# Altium PCB [PCB]-WS2805-RGBCCT-LED-DRV_2025-10-18.pcbdoc (part 1 of 2)
Units mm, origin at the board's own origin, x right, y up, seen from the top; angles counter-clockwise.
Board outline 183.91 x 132.1 mm, 2 copper layers (Top Layer, Bottom Layer); 84 components, 65 nets, 282 pads, 200 vias.
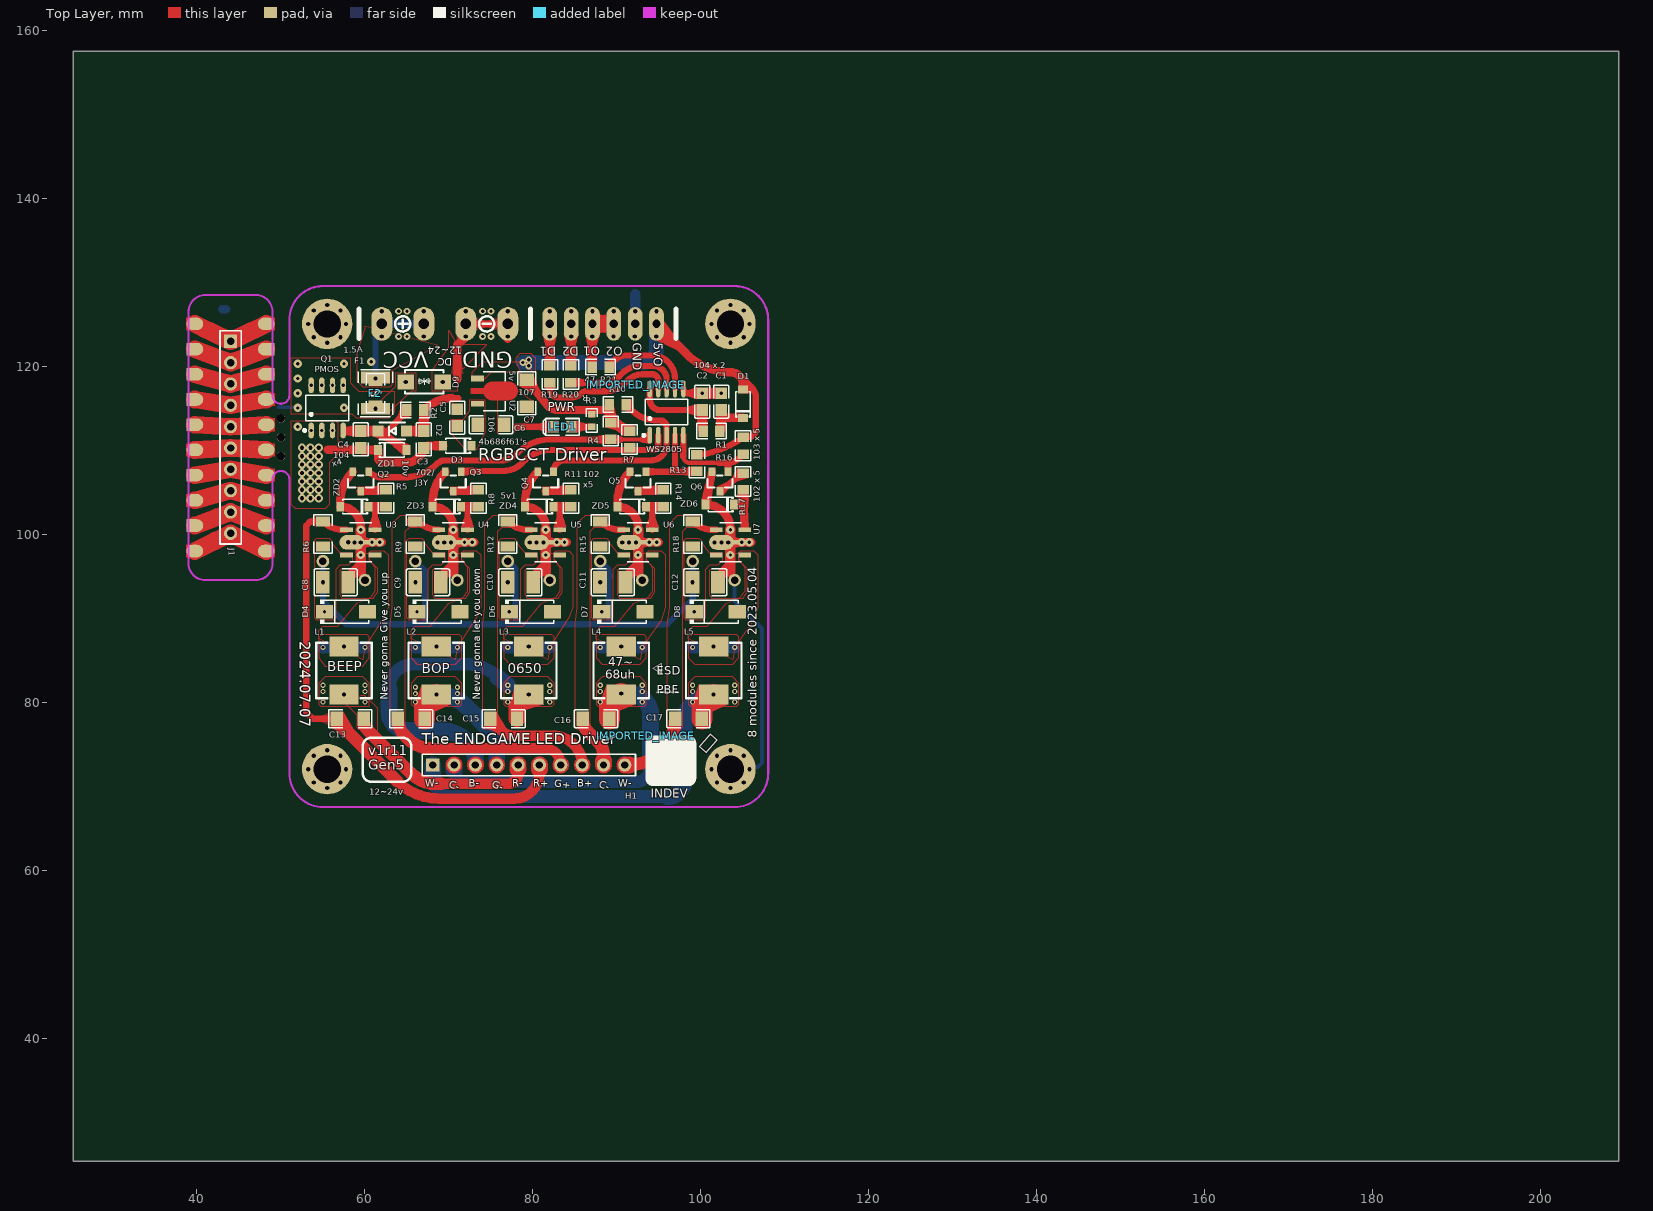
[diagram p0: Top Layer view]
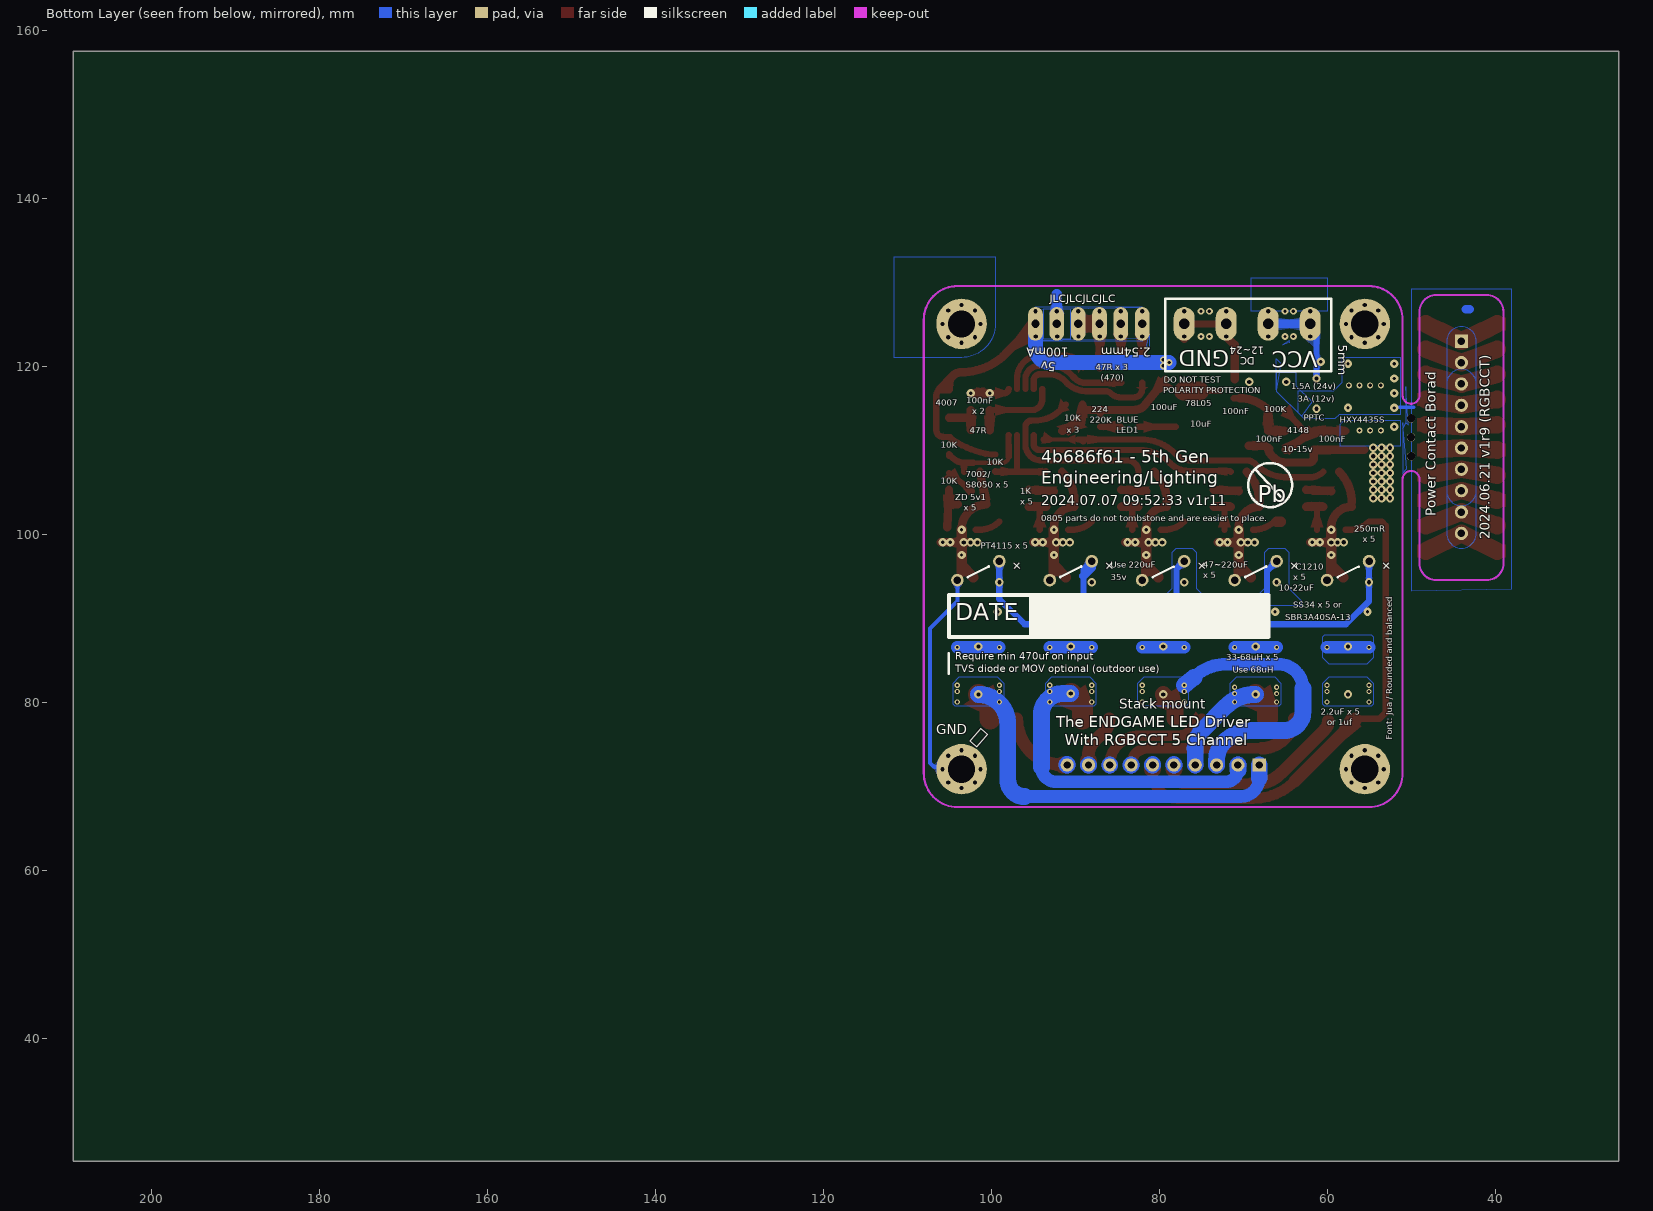
[diagram p1: Bottom Layer view, seen from below]

## Layer stack, top to bottom
Top Layer: signal copper (thickness not stored)
Dielectric: dielectric 0.32, FR-4, Dk 4.8
Bottom Layer: signal copper (thickness not stored)

## Board outline
209.307,25.4 25.4,25.4 25.4,157.498 209.307,157.498

## Components (designator, comment, footprint, x,y, rotation, side; value= is the part's Value field where it differs from the comment)
C1 "0.1uF" C0805 102.5,115.817 r90 top
C2 "0.1uF" C0805 100.25,115.817 r90 top
C3 "100nF" C0805 67.101,111.318 r90 top
C4 "100nF" C0805 59.601,111.318 r90 top
C5 "0.1uF" C0805 71.1,113.917 r90 top
C6 "10uF" C1206 75.1,113.067 r180 top
C7 "100uF" C1206 79.35,116.817 r90 top
C8 "10uF" C1210 56.6,94.317 r0 top
C9 "10uF" C1210 67.6,94.317 r0 top
C10 "10uF" C1210 78.6,94.317 r0 top
C11 "10uF" C1210 89.6,94.317 r0 top
C12 "10uF" C1210 100.6,94.317 r0 top
C13 "2.2uf" C1206 58.351,78.067 r180 top
C14 "2.2uf" C1206 65.6,78.067 r180 top
C15 "2.2uf" C1206 76.601,78.067 r0 top
C16 "2.2uf" C1206 87.599,78.067 r0 top
C17 "2.2uf" C1206 98.6,78.067 r0 top
D1 "1N4007W" SOD-123_L2.8-W1.8-LS3.7-RD 105.1,115.567 r90 top
D2 "1N4148W" SOD-123FL_L2.6-W1.6-LS3.4-RD 63.35,112.317 r180 top
D3 "1N4007W" SOD-123_L2.8-W1.8-LS3.7-RD 71.1,110.567 r180 top
D4 "SBR3A40SA-13" SMA_L4.4-W2.8-LS5.4-RD 57.85,90.817 r0 top
D5 "SBR3A40SA-13" SMA_L4.4-W2.8-LS5.4-RD 68.85,90.817 r0 top
D6 "SBR3A40SA-13" SMA_L4.4-W2.8-LS5.4-RD 79.85,90.817 r0 top
D7 "SBR3A40SA-13" SMA_L4.4-W2.8-LS5.4-RD 90.85,90.817 r0 top
D8 "SBR3A40SA-13" SMA_L4.4-W2.8-LS5.4-RD 101.85,90.817 r0 top
D9 "SMAJ30CA" SMA_L4.4-W2.8-LS5.1-BI 67.15,118.167 r180 top
F1 "3A PTC" R1206 61.35,116.817 r270 top
F2 "0ZCG0050FF2C" F1812 61.35,116.817 r90 top
H1 "HDR-F-2.54_1x10" HDR-F-2.54_1X10 79.6,72.567 r0 top
IMPORTED_IMAGE "IMPORTED_IMAGE" IMPORTED_IMAGE 92.35,117.817 r0 top
IMPORTED_IMAGE "IMPORTED_IMAGE" IMPORTED_IMAGE 93.503,76.071 r0 top
J1 "HDR-M-2.54_1x10" HDR-M-2.54_1X10 44.102,111.567 r270 top
L1 "47uh" IND-SMD_L7.2-W6.6_GPSR07X0 57.6,83.817 r270 top
L2 "47uh" IND-SMD_L7.2-W6.6_GPSR07X0 68.6,83.817 r270 top
L3 "47uh" IND-SMD_L7.2-W6.6_GPSR07X0 79.6,83.817 r270 top
L4 "47uh" IND-SMD_L7.2-W6.6_GPSR07X0 90.6,83.817 r270 top
L5 "47uh" IND-SMD_L7.2-W6.6_GPSR07X0 101.6,83.817 r270 top
LED1 "0805_B" LED0805_BLUE 83.6,112.817 r180 top
Q1 "HXY4435S" SOP-8_L4.9-W3.9-P1.27-LS6.0-BL 55.6,115.067 r0 top
Q2 "2N7002" SOT-23_L2.9-W1.3-P0.95-LS2.4-BR 59.6,106.317 r90 top
Q3 "2N7002" SOT-23_L2.9-W1.3-P0.95-LS2.4-BR 70.6,106.317 r90 top
Q4 "2N7002" SOT-23_L2.9-W1.3-P0.95-LS2.4-BR 81.6,106.317 r90 top
Q5 "2N7002" SOT-23_L2.9-W1.3-P0.95-LS2.4-BR 92.6,106.317 r90 top
Q6 "2N7002" SOT-23_L2.9-W1.3-P0.95-LS2.4-BR 102.35,106.317 r90 top
R1 "47Ω" R0805 101.351,112.316 r180 top
R2 "100KΩ" R0805 66.1,114.818 r180 top
R3 "220KΩ" R0603 87.1,113.567 r270 top
R4 "10KΩ" R0805 89.35,112.317 r90 top
R5 "1KΩ" R0805 62.6,104.317 r270 top
R6 "250MΩ" R1206 55.1,100.067 r270 top
R7 "10KΩ" R0805 91.6,111.317 r90 top
R8 "1KΩ" R0805 73.6,104.317 r270 top
R9 "250MΩ" R1206 66.1,100.067 r270 top
R10 "10KΩ" R0805 90.2,115.467 r180 top
R11 "1KΩ" R0805 84.6,104.317 r270 top
R12 "250MΩ" R1206 77.1,100.067 r270 top
R13 "10KΩ" R0805 99.6,108.517 r90 top
R14 "1KΩ" R0805 95.6,104.317 r270 top
R15 "250MΩ" R1206 88.1,100.067 r270 top
R16 "10KΩ" R0805 105.1,110.567 r90 top
R17 "1KΩ" R0805 105.1,106.317 r270 top
R18 "250MΩ" R1206 99.1,100.067 r270 top
R19 "47Ω" R0805 82.1,119.067 r90 top
R20 "47Ω" R0805 84.599,119.067 r90 top
R21 "47Ω" R0805 88.15,119.916 r180 top
U1 "WS2805" SOP-10_L4.9-W3.9-P1.00-LS6.0-BL 96,114.567 r0 top
U2 "7805(SOT-89)" SOT-89-3_L4.5-W2.5-P1.50-LS4.2-BR 74.85,117.067 r180 top
U3 "PT4115B89E" SOT-89-5_L4.5-W2.5-P1.50-LS4.5-BR 59.6,99.067 r0 top
U4 "PT4115B89E" SOT-89-5_L4.5-W2.5-P1.50-LS4.5-BR 70.6,99.065 r0 top
U5 "PT4115B89E" SOT-89-5_L4.5-W2.5-P1.50-LS4.5-BR 81.6,99.065 r0 top
U6 "PT4115B89E" SOT-89-5_L4.5-W2.5-P1.50-LS4.5-BR 92.6,99.065 r0 top
U7 "PT4115B89E" SOT-89-5_L4.5-W2.5-P1.50-LS4.5-BR 103.6,99.065 r0 top
ZD1 "16v" SOD-123_L2.8-W1.8-LS3.7-RD 63.35,110.068 r0 top
ZD2 "5v1" SOD-123_L2.8-W1.8-LS3.7-RD 58.85,103.317 r180 top
ZD3 "5v1" SOD-123_L2.8-W1.8-LS3.7-RD 69.85,103.317 r180 top
ZD4 "5v1" SOD-123_L2.8-W1.8-LS3.7-RD 80.85,103.317 r180 top
ZD5 "5v1" SOD-123_L2.8-W1.8-LS3.7-RD 91.85,103.316 r180 top
ZD6 "5v1" SOD-123_L2.8-W1.8-LS3.7-RD 102.35,103.567 r180 top
? "" ? 64.599,134.907 r0 top
? "" ? 109.598,98.567 r0 top
? "" ? 79.6,129.067 r0 top
? "" ? 61.885,66.52 r0 top
? "" ? 107.329,72.036 r0 top
? "" ? 97.315,65.89 r0 top

## Footprints (in the part's own frame and the unit in brackets; to place one, negate y for a bottom-side part, rotate by r counter-clockwise, add the part's x,y. Pads: shape width x height; smd on the part's side, far side on the other; paste and mask are expansions set on the pad)
C0805 [mm]
  rect 1.41x1.35 smd paste-100 mask+0.051: 1(-1,0) 2(1,0)
  silkscreen extent -1.96,-0.9 1.96,0.9
C1206 [mm]
  rect 1.485x1.728 smd paste-100 mask+0.051: 1(-1.593,0) 2(1.593,0)
  silkscreen extent -2.56,-1.09 2.56,1.09
C1210 [mm]
  rect 1.635x2.7 smd paste-100 mask+0.051: 1(-1.518,0) 2(1.517,0)
  silkscreen extent -2.56,-1.58 2.56,1.58
F1812 [mm]
  rect 1.407x3.499 smd paste-100 mask+0.051: 1(-1.853,0) 2(1.853,0)
  silkscreen extent -2.79,-2.03 2.79,2.03
HDR-F-2.54_1X10 [mil]
  rect 62x62 hole 35 paste+0 mask+2: 1(-450,0)
  round 62 hole 35 paste+0 mask+2: 2(-350,0) 3(-250,0) 4(-150,0) 5(-50,0) 6(50,0) 7(150,0) 8(250,0) 9(350,0) 10(450,0)
  silkscreen extent -500,-50 500,50
HDR-M-2.54_1X10 [mil]
  rect 62x62 hole 35 paste+0 mask+2: 1(-450,0)
  round 62 hole 35 paste+0 mask+2: 2(-350,0) 3(-250,0) 4(-150,0) 5(-50,0) 6(50,0) 7(150,0) 8(250,0) 9(350,0) 10(450,0)
  silkscreen extent -500,-50 500,50
IMPORTED_IMAGE [mm]
IND-SMD_L7.2-W6.6_GPSR07X0 [mm]
  rect 2.35x3.5 smd paste+0 mask+0.051: 1(-2.85,0) 2(2.85,0)
  silkscreen extent -3.3,-3.3 3.3,3.3
LED0805_BLUE [mm]
  rect 1.3x1.4 smd paste+0 mask+0.051: 1(-1.05,0) 2(1.05,0)
  silkscreen extent -2,-1 2.3,1
R0603 [mm]
  rect 0.806x0.864 smd paste-100 mask+0.051: 1(-0.753,0) 2(0.753,0)
  silkscreen extent -1.39,-0.66 1.39,0.66
R0805 [mm]
  rect 1.133x1.377 smd paste-100 mask+0.051: 1(-1,0) 2(1,0)
  silkscreen extent -1.76,-0.92 1.76,0.92
R1206 [mm]
  rect 1.208x1.701 smd paste-100 mask+0.051: 1(-1.479,0) 2(1.479,0)
  silkscreen extent -2.31,-1.08 2.31,1.08
SMA_L4.4-W2.8-LS5.1-BI [mm]
  rect 2x1.8 smd paste+0 mask+0.051: 1(-2.2,0) 2(2.2,0)
  silkscreen extent -2.3,-1.4 2.3,1.4
SMA_L4.4-W2.8-LS5.4-RD [mm]
  rect 2.046x1.62 smd paste+0 mask+0.051: 1(-2.566,0) 2(2.565,0)
  silkscreen extent -3.08,-1.44 2.7,1.44
SOD-123_L2.8-W1.8-LS3.7-RD [mm]
  rect 0.95x1.15 smd paste+0 mask+0.051: 1(-1.693,0) 2(1.693,0)
  silkscreen extent -1.58,-0.87 1.41,0.87
SOD-123FL_L2.6-W1.6-LS3.4-RD [mm]
  rect 1.3x1.3 smd paste+0 mask+0.051: 1(1.7,0) 2(-1.7,0)
  silkscreen extent -1.5,-1 1.5,1
SOP-8_L4.9-W3.9-P1.27-LS6.0-BL [mm]
  oval 0.63x1.865 smd paste+0 mask+0.051: 1(-1.905,-2.682) 2(-0.635,-2.682) 3(0.635,-2.682) 4(1.905,-2.682) 5(1.905,2.682) 6(0.635,2.682) 7(-0.635,2.682) 8(-1.905,2.682)
  silkscreen extent -2.82,-2.83 2.58,1.52
SOP-10_L4.9-W3.9-P1.00-LS6.0-BL [mm]
  oval 0.525x2.014 smd paste+0 mask+0.051: 1(-2,-2.757) 2(-1,-2.757) 3(0,-2.757) 4(1,-2.757) 5(2,-2.757) 6(2,2.757) 7(1,2.757) 8(0,2.757) 9(-1,2.757) 10(-2,2.757)
  silkscreen extent -2.86,-2.91 2.53,1.52
SOT-23_L2.9-W1.3-P0.95-LS2.4-BR [mm]
  rect 1x0.8 smd paste+0 mask+0.051: 1(1.15,-0.95) 2(1.15,0.95) 3(-1.15,0)
  silkscreen extent -0.7,-1.5 0.7,1.5
SOT-89-3_L4.5-W2.5-P1.50-LS4.2-BR [mm]
  rect 1.575x0.672 smd paste+0 mask+0.051: 1(1.356,-1.5) 3(1.356,1.5)
  Top Layer region: -2.283,0.95 -0.429,0.95 -0.384,0.949 -0.34,0.946 -0.296,0.94 -0.252,0.933 -0.208,0.924 -0.165,0.912 -0.123,0.899 -0.081,0.884 -0.04,0.866 0,0.847 0.04,0.826 0.078,0.803 0.115,0.779 0.151,0.752 0.185,0.724 0.219,0.695 0.251,0.664 0.281,0.631 0.31,0.597 0.337,0.562 0.362,0.525 0.386,0.488 0.408,0.449 0.428,0.409 0.447,0.33 2.144,0.33 2.144,-0.33 0.447,-0.33 0.428,-0.409 0.408,-0.449 0.386,-0.488 0.362,-0.526 0.337,-0.562 0.31,-0.597 0.281,-0.631 0.251,-0.664 0.219,-0.695 0.185,-0.725 0.151,-0.753 0.115,-0.779 0.078,-0.804 0.04,-0.827 0,-0.848 -0.04,-0.867 -0.081,-0.884 -0.123,-0.899 -0.165,-0.913 -0.208,-0.924 -0.252,-0.934 -0.296,-0.941 -0.34,-0.946 -0.384,-0.949 -0.429,-0.95 -2.283,-0.95 -2.328,-0.949 -2.372,-0.946 -2.416,-0.941 -2.46,-0.934 -2.504,-0.924 -2.547,-0.913 -2.589,-0.899 -2.631,-0.884 -2.672,-0.867 -2.713,-0.848 -2.752,-0.827 -2.79,-0.804 -2.827,-0.779 -2.863,-0.753 -2.898,-0.725 -2.931,-0.695 -2.963,-0.664 -2.993,-0.631 -3.022,-0.597 -3.049,-0.562 -3.075,-0.526 -3.098,-0.488 -3.12,-0.449 -3.141,-0.409 -3.159,-0.369 -3.175,-0.327 -3.189,-0.285 -3.202,-0.242 -3.212,-0.199 -3.22,-0.155 -3.227,-0.111 -3.231,-0.067 -3.233,-0.022 -3.233,0.022 -3.231,0.067 -3.227,0.111 -3.22,0.155 -3.212,0.199 -3.202,0.242 -3.189,0.285 -3.175,0.327 -3.159,0.369 -3.141,0.409 -3.12,0.449 -3.098,0.488 -3.075,0.525 -3.049,0.562 -3.022,0.597 -2.993,0.631 -2.963,0.664 -2.931,0.695 -2.898,0.724 -2.863,0.752 -2.827,0.779 -2.79,0.803 -2.752,0.826 -2.713,0.847 -2.672,0.866 -2.631,0.884 -2.589,0.899 -2.547,0.912 -2.504,0.924 -2.46,0.933 -2.416,0.94 -2.372,0.946 -2.328,0.949
  silkscreen extent -1.95,-2.33 0.7,2.33
SOT-89-5_L4.5-W2.5-P1.50-LS4.5-BR [mm]
  rect 1.5x0.574 smd paste-100 mask+0.051: 1(1.698,-1.5) 3(1.698,1.5) 4(-1.698,1.5) 5(-1.698,-1.5)
  oval 2.94x1.76 smd paste-100 mask+0.051: 2(-1.068,0)
  rect 2.209x0.552 smd paste-100 mask+0.051: 2(1.343,0)
  silkscreen extent -1.3,-2.33 1.3,2.33
? [mm]

## Free pads (board coordinates)
  oval 1.75x4 smd far side paste-100 mask+0.051: 1(82.1,125.068) 1(84.64,125.066) 1(87.18,125.068) 1(89.72,125.066) 1(92.26,125.068) 1(94.8,125.066)
  oval 1.75x4 smd paste-100 mask+0.051: 1(82.1,125.068) 1(84.64,125.066) 1(87.18,125.068) 1(89.72,125.066) 1(92.26,125.068) 1(94.8,125.066)
  round 1.75 hole 1.25 paste+0 mask+0.051: 3(62.1,125.067) 4(67.1,125.067) 5(72.1,125.067) 6(77.1,125.067)
  round 1.5 hole 0.9 paste+0 mask+0.051: 4(55.099,96.82) 4(60.1,94.568) 4(66.099,96.819) 4(71.1,94.568) 4(77.099,96.819) 4(82.1,94.568) 4(88.099,96.819) 4(93.1,94.568) 4(99.099,96.819) 4(104.1,94.568)
  rect 1x1.5 smd paste+0 mask+0.051: 5(39.351,119.069) 5(39.351,122.069) 5(39.351,116.069) 5(39.351,113.069) 5(39.351,107.068) 5(39.351,101.068) 5(48.853,119.069) 5(48.853,122.069)
  oval 2x1.5 smd paste+0 mask+0.051: 5(39.849,125.073) 5(39.849,98.032) 5(39.851,119.072) 5(39.851,122.072) 5(39.851,116.072) 5(39.851,113.072) 5(39.851,110.072) 5(39.851,107.071) 5(39.851,104.071) 5(39.851,101.071) 5(48.353,101.071) 5(48.353,104.071) 5(48.353,107.071) 5(48.353,110.072) 5(48.353,113.072) 5(48.353,116.072) 5(48.353,119.072) 5(48.353,122.072) 5(48.355,98.032) 5(48.355,125.073)
  round 6 hole 3.25 paste+0 mask+0.051: 6(55.6,72.067) 6(55.6,125.067) 6(103.6,72.067) 6(103.6,125.067)
  round 1.25 hole 1 paste+0 mask+0.051: 6(82.1,125.067) 6(84.64,125.067) 6(87.18,125.067) 6(89.72,125.068) 6(92.26,125.067) 6(94.8,125.067)
  round 1 hole 1 unplated paste+0: ""(50.098,109.318) ""(50.098,113.817) ""(50.1,111.567)
  oval 2.5x4 smd far side paste-100 mask+0.051: ""(62.1,125.068) ""(67.1,125.068) ""(72.1,125.068) ""(77.1,125.068)
  oval 2.5x4 smd paste-100 mask+0.051: ""(62.1,125.068) ""(67.1,125.068) ""(72.1,125.068) ""(77.1,125.068)

## Via types
v1: diameter 1, hole 0.5, Top Layer to Bottom Layer, tented both sides, 107 vias
v2: diameter 0.62, hole 0.31, Top Layer to Bottom Layer, tented both sides, 40 vias
v3: diameter 1, hole 0.4, Top Layer to Bottom Layer, tented both sides, 35 vias
v4: diameter 0.8, hole 0.4, Top Layer to Bottom Layer, tented both sides, 11 vias
v5: diameter 0.7, hole 0.4, Top Layer to Bottom Layer, tented both sides, 7 vias

## Nets (pads, with @x,y where several pads share a name; then routed paths per layer and width w, separated by ;. In a path a pad name is that pad's centre, name@x,y a point inside that pad or via, vN(x,y) a via of type N, cw(c..) or ccw(c..) an arc to the next point about the centre after c; other vN are vias at no path point)
+5V: C7.2 D1.2 pad.1@94.8,125.066 pad.6@94.8,125.067 R3.1 R4.2 R7.2 R10.2 R13.2 R16.2 U2.1 | length 71.1
  Top Layer w0.5: 96.287,123.567 ccw(c96.287,123.58) 96.296,123.571
  Top Layer w0.75: 87.054,114.818 cw(c86.945,114.708) 87.1,114.708 R3.1@87.1,114.32 ; R13.2@99.6,109.517 100.151,109.517 ccw(c98.207,121.208) R16.2@105.1,111.567 ; R16.2@104.953,111.567 R16.2@105.1,111.567 ; R16.2@105.087,111.554 R16.2@105.1,111.567 ; R16.2@105.15,111.617 ccw(c105.15,111.567) R16.2@105.1,111.567 ; R16.2@105.15,111.618 105.801,111.618 ; 105.8,111.617 ccw(c105.8,112.417) 106.6,112.417 106.6,116.567 ccw(c105.903,116.567) 106.396,117.06 106.196,117.259
  Top Layer w1: C7.2@79.35,118.409 81.851,115.316 ; 81.85,115.317 ccw(c83.057,116.524) 83.057,114.817 ; 83.057,114.818 R10.2@88.739,114.818 ; R10.2@89.199,115.468 R4.2@89.35,113.317 R7.2@91.6,112.317 ; v1(94.76,123.567) 96.286,123.566 ; pad.1@94.8,125.066 98.394,121.473 ; 98.393,121.474 ccw(c103.6,126.681) 103.6,119.317 ; 105.1,117.817 ccw(c103.6,117.817) 104.66,118.878 ; 105.1,117.818 D1.2@105.1,117.259 106.197,117.259 ; 106.196,117.259 104.66,118.878 ; 103.6,119.317 cw(c103.6,117.817) 104.66,118.878 ; 103.6,119.317 cw(c103.6,117.817) 104.66,118.878
  Bottom Layer w1.75: v4(78.9,120.467) 93.1,120.467 ccw(c93.1,122.167) 94.8,122.167 pad.1@94.8,125.066 94.8,122.768
  other v1: 94.8,126.567
  other v4: 79.6,120.067 79.6,120.817
B_GND: C15.2 H1.3 L3.2 | length 36.9
  Top Layer w2: C15.2@78.193,78.067 78.193,79.56 v1(79.6,80.967)
  Bottom Layer w1.5: 62.968,81.667 cw(c65.868,81.667) 65.868,84.567 72.1,84.567 cw(c72.1,79.135) 75.941,82.976
  Bottom Layer w2: 62.968,81.667 62.968,78.917 ccw(c65.217,78.917) 65.217,76.668 69.088,76.668 cw(c69.088,72.055) 72.35,75.317 ; 72.35,75.317 cw(c70.177,73.144) H1.3@73.25,73.144 ; H1.3@73.25,73.144 H1.3@73.25,72.567 ccw(c73.178,72.639) H1.3@73.28,72.639 ; 75.94,82.976 v2(77.1,82.067)
  other v2: 77.1,80.067 82.1,80.067 77.1,81.318 82.1,81.317 82.1,82.068
B_PWM: Q4.1 R10.1 U1.3 | length 23.3
  Top Layer w0.75: Q4.1@82.55,107.467 82.55,107.517 cw(c83.85,107.517) 83.85,108.817 94.1,108.817 ccw(c94.1,110.717) 96,110.717 ; R10.1@91.201,115.468 91.864,114.805 ; 91.863,114.804 ccw(c94.85,117.792) 94.85,113.567 95.25,113.567 cw(c95.25,112.817) 96,112.817 U1.3@96,111.81 95.999,110.718
B_VCC: C15.1 H1.8 R12.1 U5.4 | length 16.8
  Top Layer w0.75: R12.1@77.1,101.546 ccw(c79.466,103.912) 79.466,100.566 U5.4@79.902,100.566
  Top Layer w1.25: C15.1@75.008,78.067 76.588,76.487 ; 76.588,76.486 ccw(c77.6,77.498) 77.6,76.067 82.1,76.067 82.45,76.067 cw(c82.45,72.567) H1.8@85.95,72.567
C0: J1.1 pad.5@39.849,125.073 pad.5@48.355,125.073 | length 9.5
  Top Layer w2.1: pad.5@39.85,125.067 J1.1@44.102,122.997 pad.5@48.353,125.067
C1: J1.2 pad.5@39.351,122.069 pad.5@39.851,122.072 pad.5@48.353,122.072 pad.5@48.853,122.069 | length 9.1
  Top Layer w2.1: pad.5@39.852,122.067 J1.2@44.102,120.457 pad.5@48.351,122.067
C2: J1.3 pad.5@39.351,119.069 pad.5@39.851,119.072 pad.5@48.353,119.072 pad.5@48.853,119.069 | length 8.8
  Top Layer w2.1: pad.5@39.852,119.067 J1.3@44.102,117.917 pad.5@48.351,119.067
C3: J1.4 pad.5@39.351,116.069 pad.5@39.851,116.072 pad.5@48.353,116.072 | length 8.6
  Top Layer w2.1: pad.5@39.852,116.068 J1.4@44.102,115.377 pad.5@48.351,116.068
C4: J1.5 pad.5@39.351,113.069 pad.5@39.851,113.072 pad.5@48.353,113.072 | length 8.5
  Top Layer w2.1: pad.5@39.852,113.065 J1.5@44.102,112.837 pad.5@48.351,113.065
C5: J1.6 pad.5@39.851,110.072 pad.5@48.353,110.072 | length 8.5
  Top Layer w2.1: pad.5@39.852,110.066 J1.6@44.102,110.297 pad.5@48.351,110.066
C5_1: C5.1 C6.2 D3.1 U2.3
C6: J1.7 pad.5@39.351,107.068 pad.5@39.851,107.071 pad.5@48.353,107.071 | length 8.6
  Top Layer w2.1: pad.5@39.852,107.066 J1.7@44.102,107.757 pad.5@48.351,107.063
C7: J1.8 pad.5@39.851,104.071 pad.5@48.353,104.071 | length 8.8
  Top Layer w2.1: pad.5@39.852,104.066 J1.8@44.102,105.217 pad.5@48.351,104.064
C8: J1.9 pad.5@39.351,101.068 pad.5@39.851,101.071 pad.5@48.353,101.071 | length 9.1
  Top Layer w2.1: pad.5@39.852,101.066 J1.9@44.102,102.677 pad.5@48.351,101.064
C9: J1.10 pad.5@39.849,98.032 pad.5@48.355,98.032 | length 9.5
  Top Layer w2.1: pad.5@39.85,98.026 J1.10@44.102,100.137 pad.5@48.353,98.026
D2_1: C4.2 D2.1 Q1.4 R2.2 ZD1.2 | length 11.8
  Top Layer w0.75: 62.374,111.836 R2.2@65.1,114.818 ; R2.2@65.096,114.558 ccw(c65.087,114.567) R2.2@65.1,114.567
  Top Layer w1: 57.95,112.316 D2.1@61.65,112.317 ZD1.2@65.043,110.068
D5_2: D5.2 L2.1 U4.1 | length 5
  Bottom Layer w1.5: v2(66.1,86.567) v2(71.1,86.567)
  other v1: 68.6,86.667
D6_2: D6.2 L3.1 U5.1 | length 5
  Bottom Layer w1.5: v2(77.1,86.567) v2(82.1,86.567)
  other v1: 79.6,86.667
DI1: pad.1@82.1,125.068 pad.6@82.1,125.067 R19.2 | length 3.5
  Top Layer w1: R19.2@82.1,120.067 v1(82.1,123.566)
  other v1: 82.1,126.567
DI2: pad.1@84.64,125.066 pad.6@84.64,125.067 R20.2 | length 3.5
  Top Layer w1: R20.2@84.6,120.067 ccw(c84.6,120.107) R20.2@84.64,120.107 ; R20.2@84.64,120.106 v1(84.64,123.567)
  other v1: 84.64,126.567
DO1: pad.1@87.18,125.068 pad.1@89.72,125.066 pad.6@87.18,125.067 pad.6@89.72,125.068 R21.2 | length 6.3
  Top Layer w1: R21.2@87.1,120.067 ccw(c87.1,120.107) R21.2@87.14,120.107 ; v1(87.14,123.567) R21.2@87.149,119.918
  Top Layer w1.25: pad.6@87.18,125.067 pad.1@89.72,125.066
  other v1: 89.68,123.567 87.18,126.567 89.72,126.567
FTVS: D9.2 F1.2 F2.1 Q1.5 Q1.6 Q1.7 Q1.8 | length 2.2
  Bottom Layer w0.4: 49.75,115.167 51.5,115.167
  Bottom Layer w1: 43.1,126.817 43.6,126.817
  other v1: 61.35,114.964 64.95,118.167
  other v3: 52.1,115.067 57.6,115.067 52.1,116.817 52.1,118.567 52.1,120.316 57.6,120.317
  other v5: 53.695,117.749 54.965,117.749 56.235,117.749 57.505,117.749
G_GND: C14.1 H1.4 L2.2 | length 15.8
  Top Layer w2.5: C14.1@67.193,78.067 67.193,79.56 v1(68.6,80.967)
  Bottom Layer w2: v1(68.6,80.967) 68.721,80.967 cw(c68.721,76.188) 72.1,79.567 74.859,76.807 cw(c72.589,74.537) 75.8,74.537 ccw(c75.824,74.513) 75.79,74.513 H1.4@75.79,72.567
  other v2: 66.1,80.067 71.1,80.067 66.1,81.067 71.1,81.067 66.1,81.817 71.1,81.817
G_PWM: Q3.1 R7.1 U1.2 | length 25.6
  Top Layer w0.75: Q3.1@71.55,107.467 cw(c71.792,107.225) Q3.1@71.792,107.567 ; Q3.1@71.793,107.566 76.1,107.566 cw(c76.102,107.564) 76.102,107.567 76.6,107.567 ccw(c76.6,110.585) 78.734,108.451 78.936,108.653 cw(c82.35,105.239) 82.35,110.067 94.349,110.067 ccw(c94.349,110.718) 95.001,110.718 U1.2@95,111.81
G_VCC: C14.2 H1.7 R9.1 U4.4 | length 26.1
  Top Layer w0.75: R9.1@66.1,101.546 66.1,101.558 66.219,101.677 ccw(c68.903,104.36) U4.4@68.903,100.566
  Top Layer w1.25: R9.1@65.6,101.546 R9.1@66.1,101.546 ; 67.85,74.567 81.41,74.567 cw(c81.41,72.567) H1.7@83.41,72.567
  Top Layer w1.5: C14.2@64.008,78.067 ccw(c66.802,78.067) 64.826,76.091 65.1,75.817 65.289,75.628 ccw(c67.85,78.188) 67.85,74.567
  Bottom Layer w2: H1.7@83.41,72.567 cw(c83.444,72.567) H1.7@83.42,72.591
GND: C1.2 C2.2 C3.2 C5.2 C6.1 C7.1 C8.2 C9.2 C10.2 C11.2 C12.2 D2.2 D9.1 LED1.2 pad.1@92.26,125.068 pad.4@60.1,94.568 pad.4@71.1,94.568 pad.4@82.1,94.568 pad.4@93.1,94.568 pad.4@104.1,94.568 pad.5@72.1,125.067 pad.6@77.1,125.067 pad.6@92.26,125.067 pad.6@103.6,72.067 pad.@72.1,125.068 pad.@77.1,125.068 Q2.2 Q3.2 Q4.2 Q5.2 Q6.2 R2.1 U1.6 U3.2 U4.2 U5.2 U6.2 U7.2 ZD2.2 ZD3.2 ZD4.2 ZD5.2 ZD6.2 | length 158.4
  Top Layer w0.75: ZD2.2@57.157,103.317 ZD2.2@57.158,103.864 ; v3(59.599,100.567) v3@59.599,100.876 ; ZD3.2@68.157,103.317 ZD3.2@68.158,103.864 ; 70.479,116.217 71.201,116.217 ; v3(70.599,100.565) ccw(c70.597,100.568) v3@70.6,100.568 ; 78.1,112.817 80.486,112.817 ; ZD4.2@79.157,103.317 ZD4.2@79.157,103.863 ; 80.487,112.816 LED1.2@82.55,112.817 ; U1.6@98,117.324 ccw(c98.506,117.323) 98.506,116.817 C2.2@100.251,116.817
  Top Layer w0.8: pad.@72.1,125.068 pad.@77.101,125.067 ; pad.@77.1,124.07 pad.@77.1,125.068
  Top Layer w1: ZD2.2@57.157,103.317 cw(c57.158,100.876) v3@59.599,100.876 ; ZD2.2@57.158,103.864 cw(c62.253,103.864) Q2.2@58.65,107.467 ; v1(59.6,99.067) 60.944,99.067 v3@62.1,99.067 ; D2.2@65.05,112.317 67.101,112.316 R2.1@67.101,114.818 ; R2.1@67.1,114.817 cw(c70.48,111.437) 70.48,116.217 ; ZD3.2@68.157,103.317 cw(c68.158,100.876) v3@70.599,100.876 ; ZD3.2@68.158,103.864 cw(c73.253,103.864) Q3.2@69.65,107.467 ; v1(69.532,99.065) v3(71.942,99.065) v3@73.101,99.065 ; 71.099,118.468 71.099,121.854 71.099,122.567 v1(72.1,123.567) ; pad.@77.1,123.267 pad.@77.1,125.068 ; ZD4.2@79.157,103.317 cw(c79.157,100.875) v3@81.598,100.875 ; ZD4.2@79.157,103.863 cw(c84.254,103.863) Q4.2@80.65,107.467 ; v1(80.532,99.066) U5.2@82.943,99.066 v3@84.099,99.065 ; ZD5.2@90.157,103.317 cw(c90.157,100.875) v3@92.598,100.875 ; ZD5.2@90.157,103.863 cw(c95.253,103.863) Q5.2@91.65,107.467 ; U6.2@91.533,99.065 93.944,99.065 v3@95.1,99.065 ; C2.2@100.251,116.817 v3(102.5,116.817) ; ZD6.2@100.657,103.567 cw(c100.658,100.626) 103.599,100.626 v3(103.599,100.566) ; ZD6.2@100.657,103.568 Q6.2@101.4,107.467 ; v1(102.533,99.066) v3(104.942,99.066) v3@106.1,99.065
  Top Layer w1.25: C8.2@58.186,94.904 59.601,96.319 ; 59.6,95.567 v3@59.6,100.567 ; C9.2@69.187,94.902 70.601,96.317 ; 70.6,95.565 v3(70.599,100.565) ; C10.2@80.185,94.902 81.6,96.317 ; 81.6,95.565 81.6,97.565 v3(81.599,100.565) ; C11.2@91.185,94.902 92.6,96.317 ; 92.6,95.565 v3(92.6,97.565) v3@92.6,100.566 ; C12.2@102.186,94.902 103.601,96.317 ; v3(103.599,100.566) v3@103.599,100.626 ; 103.6,95.565 v3(103.599,100.566)
  Top Layer w2.25: 75.26,117.077 77.16,117.077
  Bottom Layer w0.5: pad.6@103.601,72.067 103.85,72.316 106.85,72.316 107.35,72.816 107.35,88.816 104.099,92.067 pad.4@104.099,94.566
  Bottom Layer w1.25: pad.1@92.25,126.577 ccw(c92.26,126.577) v1(92.26,126.567) ; pad.1@92.285,124.574 92.285,127.556 92.285,128.575
  other v1: 103.6,69.817 102.009,70.476 105.191,70.476 101.35,72.067 105.85,72.067 102.009,73.658 105.191,73.658 103.6,74.317 58.1,99.068 58.85,99.067 68.716,99.065 70.349,99.065 79.716,99.066 81.349,99.065 90.716,99.066 91.532,99.066 92.349,99.066 101.716,99.066 103.35,99.066 69.35,118.167 77.1,123.567 92.22,123.566 72.1,126.567 77.1,126.567
  other v3: 59.6,97.567 70.6,97.565 81.6,97.565 103.6,97.566 60.942,99.067 61.849,99.067 72.849,99.066 82.942,99.065 83.849,99.066 93.942,99.066 94.849,99.066 105.849,99.066 92.599,100.566 100.25,116.817
  other v4: 74.1,123.567 75.1,123.567 74.1,126.567 75.1,126.567
HOLE1: pad.6@103.6,125.067
  other v1: 103.6,122.817 102.009,123.476 105.191,123.476 101.35,125.067 105.85,125.067 102.009,126.658 105.191,126.658 103.6,127.317
HOLE3: pad.6@55.6,72.067
  other v1: 55.6,69.817 54.009,70.476 57.191,70.476 53.35,72.067 57.85,72.067 54.009,73.658 57.191,73.658 55.6,74.317
HOLE4: pad.6@55.6,125.067
  other v1: 55.6,122.817 54.009,123.476 57.191,123.476 53.35,125.067 57.85,125.067 54.009,126.658 57.191,126.658 55.6,127.317
LED1_1: LED1.1 R3.2 | length 2.4
  Top Layer w0.75: LED1.1@84.65,112.817 87.091,112.816 cw(c87.092,112.805) R3.2@87.1,112.814
N/A: 
Q3_3: Q3.3 R8.1 | length 3
  Top Layer w1: Q3.3@70.6,105.167 R8.1@73.601,105.318
Q4_3: Q4.3 R11.1 | length 3
  Top Layer w1: Q4.3@81.6,105.167 84.599,105.318 R11.1@84.599,105.326
R1_1: C1.1 D1.1 R1.1 | length 5.2
  Top Layer w0.75: R1.1@102.35,112.317 ccw(c102.35,112.467) R1.1@102.5,112.467 ; D1.1@104.986,113.888 cw(c104.986,113.875) D1.1@105,113.875
  Top Layer w1: R1.1@102.499,112.466 C1.1@102.5,114.817 ; 102.499,113.888 D1.1@105.1,113.876
R5_1: Q2.3 R5.1 | length 3
  Top Layer w1: Q2.3@59.6,105.167 R5.1@62.6,105.318
R5_2: R5.2 U3.3 ZD2.1 | length 4.8
  Top Layer w0.75: U3.3@61.298,100.567 61.297,103.317
  Top Layer w1: ZD2.1@60.542,103.317 R5.2@62.6,103.317
R14_1: Q5.3 R14.1 | length 3
  Top Layer w1: Q5.3@92.6,105.167 R14.1@95.6,105.318
R14_2: R14.2 U6.3 ZD5.1 | length 4.8
  Top Layer w0.75: U6.3@94.298,100.566 94.297,103.317
  Top Layer w1: ZD5.1@93.542,103.317 R14.2@95.6,103.317
R17_1: Q6.3 R17.1 | length 3.5
  Top Layer w0.75: Q6.3@102.35,105.167 R17.1@105.1,107.317
R17_2: R17.2 U7.3 ZD6.1 | length 5.7
  Top Layer w0.75: ZD6.1@104.042,103.567 cw(c104.063,103.567) ZD6.1@104.063,103.588
  Top Layer w1: ZD6.1@104.042,103.567 ZD6.1@104.1,103.567 ; ZD6.1@104.063,103.589 105.186,103.581 ; R17.2@105.1,105.318 105.321,100.858
R_GND: C13.1 H1.5 L1.2 | length 23.6
  Top Layer w1.25: 69.1,70.317 77.1,70.317 ccw(c77.1,71.547) 78.33,71.547 ; H1.5@78.33,71.797 H1.5@78.33,72.567
  Top Layer w1.5: C13.1@59.943,77.801 ccw(c61.334,77.801) 60.35,76.817 65.6,71.567 ; 65.6,71.567 ccw(c68.618,74.585) 68.618,70.317 69.1,70.317
  Top Layer w2: H1.5@78.33,72.09 H1.5@78.33,72.567
  Bottom Layer w2: H1.5@78.33,72.567 ccw(c78.282,72.615) H1.5@78.35,72.615
  other v1: 57.6,80.967
  other v2: 55.1,80.067 60.1,80.067 55.1,81.317 60.1,81.317 55.1,82.068 60.1,82.068
R_PWM: Q2.1 R4.1 U1.1 | length 34.8
  Top Layer w0.5: R4.1@89.702,111.318 93.101,111.318
  Top Layer w0.75: Q2.1@60.55,107.467 ccw(c62.119,109.036) 62.119,106.817 64.229,106.817 64.85,106.817 ccw(c64.85,112.145) 68.618,108.378 cw(c69.678,107.317) 69.678,108.817 ; 69.679,108.816 76.187,108.816 ; 76.289,108.817 ccw(c76.289,111.378) 78.1,109.567 78.173,109.64 cw(c82.221,105.592) 82.221,111.317 ; 82.222,111.318 R4.1@89.35,111.317 ; R4.1@89.1,111.067 cw(c89.703,110.463) R4.1@89.703,111.317 ; 93.101,111.318 U1.1@93.799,111.318
R_VCC: C13.2 H1.6 R6.1 U3.4 | length 62.6
  Top Layer w0.75: R6.1@55.1,101.546 ccw(c57.463,103.909) 57.463,100.567 U3.4@57.903,100.567 ; R6.1@55.1,101.546 53.578,101.546 53.101,101.066 53.101,78.816 53.85,78.067 C13.2@56.758,78.067
  Top Layer w1.25: 63.924,70.65 ccw(c68.952,75.678) 68.952,68.567 69.1,68.567 77.1,68.567 77.85,68.567 ccw(c77.85,71.567) 80.85,71.567 H1.6@80.85,72.535 ; H1.6@80.85,72.547 cw(c80.87,72.547) H1.6@80.87,72.567
  Top Layer w1.5: C13.2@56.758,78.067 56.758,77.815 63.924,70.65
  Top Layer w2: H1.6@80.87,72.09 H1.6@80.87,72.567
  Bottom Layer w2: H1.6@80.85,72.616 cw(c80.801,72.567) H1.6@80.87,72.567
S$23297: 
S$73311: 
S$73555: 
S$196430: 
S$242274: 
U1_7: R21.1 U1.7 | length 11.2
  Top Layer w0.75: R21.1@89.151,119.918 89.644,120.609 ; 89.643,120.61 cw(c91.35,118.903) 91.35,121.317 94.25,121.317 cw(c94.25,118.567) 97,118.567 U1.7@97,117.324
U1_8: R20.1 U1.8 | length 14.1
  Top Layer w0.75: R20.1@84.599,118.067 88.892,118.067 ccw(c88.892,119.774) 90.1,118.567 90.716,119.183 cw(c92.85,117.049) 92.85,120.067 94.4,120.067 cw(c94.4,118.467) 96,118.467 ; U1.8@96,117.324 95.999,118.468
U1_9: R19.1 U1.9 | length 16.6
  Top Layer w0.75: 82.1,117.317 ccw(c83.1,117.317) 83.1,116.317 84.643,116.317 ccw(c84.643,118.024) 85.85,116.817 cw(c86.453,116.213) 86.453,117.067 87.264,117.067 88.85,117.067 ; 82.1,117.317 R19.1@82.1,118.067 ; 88.686,117.067 ccw(c88.686,120.481) 91.1,118.067 91.393,118.36 cw(c93.1,116.653) 93.1,119.067 ; 93.1,119.067 94.3,119.067 cw(c94.3,118.367) 95,118.367 ; U1.9@95,117.324 95.001,118.366
U1_10: C2.1 R1.2 U1.10 | length 10.8
  Top Layer w0.75: 94,116.067 ccw(c95.25,116.067) 95.25,114.817 ; 94,116.068 U1.10@94,117.324 ; 95.249,114.818 C2.1@100.251,114.818 ; R1.2@100.25,112.417 ccw(c100.35,112.417) R1.2@100.351,112.316
  Top Layer w1: R1.2@100.251,112.418 C2.1@100.251,114.818
U3_1: D4.2 L1.1 U3.1 | length 5
  Bottom Layer w1.5: v2(55.1,86.567) v2(60.1,86.567)
  other v1: 57.6,86.667
U4_3: R8.2 U4.3 ZD3.1 | length 4.8
  Top Layer w0.75: U4.3@72.298,100.566 72.298,103.317
  Top Layer w1: ZD3.1@71.544,103.317 R8.2@73.601,103.317
U5_3: R11.2 U5.3 ZD4.1 | length 4.8
  Top Layer w0.75: U5.3@83.299,100.566 83.299,103.317
  Top Layer w1: ZD4.1@82.542,103.317 R11.2@84.6,103.317
U6_1: D7.2 L4.1 U6.1 | length 5
  Bottom Layer w1.5: v2(88.1,86.567) v2(93.1,86.567)
  other v1: 90.6,86.667
U7_1: D8.2 L5.1 U7.1 | length 5
  Bottom Layer w1.5: v2(99.1,86.567) v2(104.1,86.567)
  other v1: 101.6,86.667
VCC: C3.1 C4.1 C8.1 C9.1 C10.1 C11.1 C12.1 D3.2 D4.1 D5.1 D6.1 D7.1 D8.1 pad.4@55.099,96.82 pad.4@66.099,96.819 pad.4@77.099,96.819 pad.4@88.099,96.819 pad.4@99.099,96.819 Q1.1 Q1.2 Q1.3 R6.2 R9.2 R12.2 R15.2 R18.2 U3.5 U4.5 U5.5 U6.5 U7.5 ZD1.1 | length 97.5
  Top Layer w0.75: C3.1@66.85,110.231 C3.1@67.101,110.318
  Top Layer w1: 55.659,110.068 ZD1.1@61.658,110.068 61.658,109.423 ; 61.658,109.174 ccw(c62.265,109.174) 62.265,108.567 65.1,108.567 ccw(c65.1,110.378) 66.38,109.097 66.747,109.464 ccw(c65.894,110.317) 67.1,110.317 cw(c67.704,109.713) C3.1@67.704,110.567 ; C3.1@67.703,110.566 D3.2@69.407,110.567
  Bottom Layer w0.75: pad.4@55.1,96.817 55.1,92.067 57.851,89.316 96.1,89.316 99.1,92.316 pad.4@99.1,96.817 ; pad.4@66.1,96.817 67.233,95.684 67.233,89.316 ; pad.4@77.1,96.817 78.01,95.907 78.01,89.316 ; pad.4@88.1,96.817 89.077,95.84 89.077,89.316
  Bottom Layer w1: pad.4@88.1,96.817 88.1,96.067 89.1,95.067
  other v1: 55.1,94.317 66.1,94.317 77.1,94.317 88.1,94.317 99.1,94.317 52.6,104.317 53.6,104.317 54.6,104.317 52.6,105.317 53.6,105.317 54.6,105.317 52.6,106.317 53.6,106.317 54.6,106.317 52.6,107.317 53.6,107.317 54.6,107.317 52.6,108.317 53.6,108.317 54.6,108.317 52.6,109.317 53.6,109.317 54.6,109.317 52.6,110.317 53.6,110.317 54.6,110.317
  other v3: 55.284,90.817 66.284,90.817 77.284,90.817 88.284,90.817 99.284,90.817 52.1,112.817
  other v5: 53.695,112.384 54.965,112.384 56.235,112.384
VCC_IN: F1.1 F2.2 pad.3 pad.4@67.1,125.067 pad.@62.1,125.068 pad.@67.1,125.068 | length 13.4
  Top Layer w1: v1(62.1,123.567) pad.@62.1,125.068
  Bottom Layer w0.75: pad.@61.35,124.317 cw(c62.1,124.317) pad.@62.1,125.068 ; v1(61.35,118.567) pad.@61.351,124.318
  Bottom Layer w1: pad.@62.1,125.068 pad.@67.1,125.068
  other v1: 67.1,123.567 62.1,126.567 67.1,126.567
  other v3: 60.85,120.567
  other v4: 64.1,123.567 65.1,123.567 64.1,126.567 65.1,126.567
W1_GND: C16.2 H1.2 L4.2 | length 41.1
  Top Layer w2.5: C16.2@89.192,78.067 89.192,79.659 v1(90.6,81.067)
  Bottom Layer w1.5: H1.2@70.71,72.567 70.71,71.957 ccw(c72.1,71.957) 72.1,70.567 92.24,70.567 ; 92.35,70.567 ccw(c92.35,72.317) 94.1,72.317
  Bottom Layer w2: H1.2@70.71,71.957 H1.2@70.71,72.567 ; v1(90.6,81.067) 91.6,81.067 cw(c91.6,78.567) 94.1,78.567 94.1,72.317
  other v2: 88.1,80.068 93.1,80.068 88.1,81.317 93.1,81.317 88.1,82.068 93.1,82.068
W1_PWM: Q5.1 R13.1 U1.4 | length 10.5
  Top Layer w0.75: Q5.1@93.55,107.467 93.55,107.517 Q5.1@93.6,107.567 ; Q5.1@93.55,107.467 R13.1@99.55,107.467 ; 97,110.467 U1.4@97,111.81 ; 97.004,107.467 97.004,110.463 ; R13.1@99.549,107.467 ccw(c99.549,107.517) R13.1@99.6,107.517
W1_VCC: C16.1 H1.9 R15.1 U6.4 | length 9.9
  Top Layer w0.75: R15.1@88.1,101.546 ccw(c90.467,103.912) 90.467,100.565 U6.4@90.903,100.566
  Top Layer w1.25: H1.9@88.49,72.567 ccw(c88.466,72.591) H1.9@88.5,72.591
  Top Layer w1.5: C16.1@86.007,78.067 ccw(c88.198,78.067) 86.649,76.518 ; 86.649,76.518 87.1,76.067 87.821,75.346 cw(c86.182,73.707) 88.5,73.707 H1.9@88.5,72.591
  Top Layer w2: H1.9@88.49,72.567 H1.9@88.49,73.044
  Bottom Layer w2: H1.9@88.49,72.567 cw(c88.524,72.567) H1.9@88.5,72.591
W2_GND: C17.2 H1.1 L5.2 | length 49.5
  Top Layer w2.5: C17.2@100.192,78.067 100.192,79.56 v1(101.6,80.967)
  Bottom Layer w1.5: 68.17,71.247 68.17,70.997 ccw(c70.35,70.997) 70.35,68.817 96.1,68.817
  Bottom Layer w2: 68.171,70.998 H1.1@68.17,72.567 ; 96.1,68.817 ccw(c96.1,70.817) 98.1,70.817 ; 98.099,71.066 98.099,77.462 ; 98.1,77.467 cw(c101.6,77.467) v1(101.6,80.967)
  other v2: 99.1,80.067 104.1,80.067 99.1,81.317 104.1,81.317 99.1,82.067 104.1,82.067
W2_PWM: Q6.1 R16.1 U1.5 | length 12
  Top Layer w0.5: 98,109.267 ccw(c98.723,109.267) 98.723,108.544 102.223,108.544 ; R16.1@105.1,109.317 R16.1@105.1,109.567
  Top Layer w0.75: 98,109.267 98,110.617 ; 98,110.617 U1.5@98,111.81 ; 102.223,108.544 103.299,108.544 ; Q6.1@103.3,107.467 103.299,108.544 ; R16.1@105.1,109.337 R16.1@105.1,109.567 104.627,109.094 cw(c103.299,110.423) 103.299,108.544
W2_VCC: C17.1 H1.10 R18.1 U7.4 | length 12.7
  Top Layer w0.75: R18.1@99.1,101.546 ccw(c101.467,103.912) 101.467,100.565 U7.4@101.903,100.566
  Top Layer w1.25: H1.10@91.03,72.567 H1.10@91.507,72.567
  Top Layer w1.5: H1.10@91.507,72.567 ccw(c91.507,78.067) C17.1@97.007,78.067
  Top Layer w2: H1.10@91.03,72.567 H1.10@91.507,72.567
  Bottom Layer w2: H1.10@91.03,72.567 ccw(c90.982,72.615) H1.10@91.05,72.615

## Polygon pours and split planes (outlines as drawn)
VCC_IN on Bottom Layer (solid): 67.1,127.567 cw(c67.1,125.817) 68.85,125.817 68.85,124.567 68.85,124.067 cw(c67.35,124.067) 67.35,122.567 62.1,122.567 cw(c62.1,124.317) 60.35,124.317 60.35,124.567 60.35,126.067 cw(c61.85,126.067) 61.85,127.567 63.1,127.567 67.1,127.567
W2_GND on Bottom Layer (solid): 98.85,79.566 104.35,79.567 104.6,79.817 104.6,82.316 103.85,83.067 99.35,83.067 98.6,82.316 98.6,79.817
W1_GND on Bottom Layer (solid): 87.85,79.567 93.35,79.567 93.6,79.817 93.6,82.317 92.85,83.067 88.35,83.067 87.6,82.317 87.6,79.817
B_GND on Bottom Layer (solid): 76.851,79.567 82.35,79.567 82.6,79.817 82.6,82.317 81.85,83.067 77.35,83.067 76.6,82.317 76.6,79.817
R_GND on Bottom Layer (solid): 54.85,79.567 60.35,79.567 60.6,79.817 60.6,82.317 59.85,83.067 55.35,83.067 54.6,82.317 54.6,79.817
VCC on Bottom Layer (solid): 86.6,96.067 86.6,97.817 87.1,98.317 89.1,98.317 89.6,97.817 89.6,97.067 89.6,93.567 91.1,92.067 91.1,91.567 85.1,91.567 85.1,92.067 86.6,93.567
VCC on Bottom Layer (solid): 97.6,96.067 97.6,97.817 98.1,98.317 100.1,98.317 100.6,97.817 100.6,97.067 100.6,92.817 100.6,91.567 97.6,89.817 96.1,91.567 96.1,92.067 97.6,93.567
VCC on Bottom Layer (solid): 100.6,92.817 100.6,90.317 98.6,88.317 53.35,88.317 51.35,90.317 51.35,110.817 52.1,111.567 57.85,111.567 58.6,110.817 58.6,105.567 56.85,103.567 56.85,93.817 57.85,92.817
VCC on Bottom Layer (solid): 64.6,96.067 64.6,97.817 65.1,98.317 67.1,98.317 67.6,97.817 67.6,97.067 67.6,93.567 69.1,92.067 69.1,91.567 63.1,91.567 63.1,92.067 64.6,93.567
VCC on Bottom Layer (solid): 75.6,96.067 75.6,97.817 76.1,98.317 78.1,98.317 78.6,97.817 78.6,97.067 78.6,93.567 80.1,92.067 80.1,91.567 74.1,91.567 74.1,92.067 75.6,93.567
N/A on Bottom Layer (solid): 44.102,103.447 cw(c44.102,105.197) 42.352,105.197 cw(c44.102,105.197) 42.352,105.247 42.352,105.997 42.352,122.996 cw(c44.102,122.996) 44.102,124.746 cw(c44.102,122.996) 45.852,122.996 45.852,105.247 cw(c44.103,105.197) 45.853,105.197 cw(c44.103,105.197) 44.104,103.447 44.102,103.447
N/A on Bottom Layer (solid): 44.102,98.367 cw(c44.102,100.117) 42.352,100.117 cw(c44.102,100.117) 42.353,100.167 42.353,100.917 42.353,117.916 cw(c44.103,117.916) 44.103,119.666 cw(c44.103,117.916) 45.853,117.916 45.853,100.167 cw(c44.103,100.117) 45.853,100.117 cw(c44.103,100.117) 44.104,98.367 44.102,98.367
N/A on Bottom Layer (solid): 44.104,98.367 cw(c44.104,100.117) 44.104,98.367
N/A on Bottom Layer (solid): 44.104,103.447 cw(c44.104,105.197) 44.104,103.447
G_GND on Bottom Layer (solid): 65.851,79.567 71.35,79.567 71.6,79.817 71.6,82.317 70.85,83.067 66.35,83.067 65.6,82.317 65.6,79.817
VCC on Bottom Layer (solid): 51.35,110.567 51.35,113.317 51.35,113.567 58.1,113.567 58.6,113.067 58.6,110.567
N/A on Bottom Layer (solid): 99.6,130.067 99.6,126.067 99.6,125.067 ccw(c103.6,125.067) 103.6,121.067 104.6,121.067 111.6,121.067 111.6,133.067 99.6,133.067
N/A on Bottom Layer (solid): 94.85,127.067 94.85,126.817 82.1,127.067 94.85,127.067
N/A on Bottom Layer (solid): 82.05,123.066 82.05,123.316 94.8,123.066 82.05,123.066
N/A on Bottom Layer (solid): 50.7,117.567 50.7,113.317 51.1,112.567 50.7,113.317 50.45,113.067
N/A on Bottom Layer (solid): 51.1,113.317 51.1,107.317 50.6,107.817 51.1,113.317
N/A on Bottom Layer (solid): 90.6,126.817 93.85,126.817 93.85,123.317 90.6,123.317
G_GND on Bottom Layer (solid): 60.35,88.067 54.85,88.067 54.6,87.817 54.6,85.317 55.35,84.567 59.85,84.567 60.6,85.317 60.6,87.817
N/A on Bottom Layer (solid): 81.23,123.837 81.23,121.987 81.53,122.487
GND on Bottom Layer (solid): 100.1,67.567 100.1,72.317 cw(c103.35,72.317) 103.35,75.567 106.6,75.567 106.6,88.817 108.1,88.817 108.1,67.567 100.1,67.567
FTVS on Bottom Layer (solid): 38.102,129.167 50.102,129.167 50.1,93.317 38.1,93.567
FTVS on Bottom Layer (solid): 62.85,113.817 59.1,113.817 58.6,114.317 51.35,114.317 51.35,114.567 51.35,120.067 51.35,121.067 52.35,121.067 58.35,121.067 58.35,118.067 59.35,117.067 63.6,117.067 63.6,116.067 63.6,114.567
VCC_IN on Bottom Layer (solid): 60.1,122.317 60.1,126.817 cw(c61.1,126.817) 61.1,127.817 68.1,127.817 cw(c68.1,126.817) 69.1,126.817 69.1,123.317 cw(c68.1,123.317) 68.1,122.317 64.35,122.317
VCC_IN on Bottom Layer (solid): 63.35,117.817 63.1,117.567 59.85,117.567 59.1,118.317 59.1,121.567 60.1,124.567 60.1,125.567 68.7,122.507 63.35,119.567 63.35,117.817
VCC_IN on Bottom Layer (solid): 60.1,126.567 69.1,126.567 69.1,130.567 60.1,130.567
GND on Bottom Layer (solid): 51.1,129.567 108.1,129.567 108.1,88.317 51.1,88.317 51.1,88.817
VCC_IN on Bottom Layer (solid): 65.35,122.567 64.85,122.817 64.534,122.883 64.6,123.067 65.35,122.567
FTVS on Bottom Layer (solid): 63.75,117.667 63.75,119.267 66.15,119.267 66.15,117.067 63.1,114.067 61.85,115.817
N/A on Bottom Layer (solid): 66.15,117.227 66.15,120.927 65.6,120.377
GND on Top Layer (solid): 70.1,126.567 cw(c71.35,126.567) 71.35,127.817 78.1,127.817 cw(c78.1,126.817) 79.1,126.817 79.1,123.567 cw(c77.85,123.567) 77.85,122.317 74.1,122.317 71.1,122.317 cw(c71.1,123.317) 70.1,123.317 70.1,124.567 70.1,126.567
VCC_IN on Top Layer (solid): 60.1,122.317 60.1,126.817 cw(c61.1,126.817) 61.1,127.817 68.1,127.817 cw(c68.1,126.817) 69.1,126.817 69.1,123.317 cw(c68.1,123.317) 68.1,122.317 64.35,122.317
U3_1 on Top Layer (solid): 60.35,88.067 55.1,88.067 54.6,87.817 54.6,85.317 55.35,84.317 59.85,84.317 60.6,85.317 60.6,87.817
R_GND on Top Layer (solid): 54.85,79.567 60.6,79.567 60.6,82.317 59.85,83.067 55.35,83.067 54.6,82.317 54.6,79.817
R_GND on Top Layer (solid): 59.1,78.567 59.1,77.067 59.35,76.817 61.6,76.317 61.6,77.317 61.6,79.317 60.1,80.817 59.6,80.817 58.35,80.067 57.35,80.317
U3_1 on Top Layer (solid): 59.85,85.067 54.6,87.567 54.6,88.567 55.1,89.067 56.85,89.067 59.1,91.817 60.85,92.567 61.35,93.317 61.35,96.067 60.6,97.067 60.6,97.817 60.85,98.067 62.35,98.067 62.85,97.567 62.85,91.317 62.35,90.067 60.1,86.567 59.85,85.067
FTVS on Top Layer (solid): 62.85,113.817 59.1,113.817 58.6,114.317 51.35,114.317 51.35,114.567 51.35,120.067 51.35,121.067 58.35,121.067 58.35,118.067 59.35,117.067 63.6,117.067 63.6,116.067 63.6,114.567
VCC_IN on Top Layer (solid): 59.1,119.567 59.1,118.317 59.85,117.567 63.1,117.567 63.35,117.817 63.35,119.567 68.7,122.507 60.1,124.817 60.1,124.567 59.1,121.567 59.1,121.067
VCC on Top Layer (solid): 51.35,113.317 51.35,113.567 56.6,113.567 56.85,113.317 56.85,109.567 55.85,108.567 55.85,103.567 55.35,103.067 51.85,103.067 51.35,103.567
GND on Top Layer (solid): 57.1,92.817 57.35,92.442 61.1,92.442 61.6,93.192 61.6,95.942 60.6,96.942 60.6,97.692 59.1,97.692 59.1,95.942 57.35,95.942 57.1,95.692
D6_2 on Top Layer (solid): 82.35,88.067 77.1,88.067 76.6,87.817 76.6,85.317 77.35,84.567 81.85,84.567 82.6,85.317 82.6,87.817
U6_1 on Top Layer (solid): 93.35,88.065 88.1,88.065 87.6,87.815 87.6,85.315 88.35,84.567 92.85,84.567 93.6,85.315 93.6,87.815
U7_1 on Top Layer (solid): 104.35,88.067 99.1,88.067 98.6,87.817 98.6,85.317 99.35,84.567 103.85,84.567 104.6,85.317 104.6,87.817
D5_2 on Top Layer (solid): 70.85,85.067 65.6,87.567 65.6,88.567 66.1,89.067 67.85,89.067 70.1,91.817 71.85,92.567 72.35,93.317 72.35,96.067 71.6,97.067 71.6,97.817 71.85,98.067 73.35,98.067 73.85,97.567 73.85,91.317 73.35,90.067 71.1,86.567 70.85,85.067
D6_2 on Top Layer (solid): 81.85,85.067 76.6,87.567 76.6,88.567 77.1,89.067 78.85,89.067 81.1,91.817 82.85,92.567 83.35,93.317 83.35,96.067 82.6,97.067 82.6,97.817 82.85,98.067 84.35,98.067 84.85,97.567 84.85,91.317 84.35,90.067 82.1,86.567 81.85,85.067
U6_1 on Top Layer (solid): 92.85,85.067 87.6,87.567 87.6,88.567 88.1,89.067 89.85,89.067 92.1,91.817 93.85,92.567 94.35,93.317 94.35,96.067 93.6,97.067 93.6,97.817 93.85,98.067 95.35,98.067 95.85,97.567 95.85,91.317 95.35,89.817 93.1,86.567 92.85,85.067
U7_1 on Top Layer (solid): 103.85,85.067 98.6,87.567 98.6,88.567 99.1,89.067 100.85,89.067 103.1,91.817 104.85,92.567 105.35,93.317 105.35,96.067 104.6,97.067 104.6,97.817 104.85,98.067 106.35,98.067 106.85,97.567 106.85,91.317 106.35,89.817 104.1,86.567 103.85,85.067
GND on Top Layer (solid): 68.1,92.817 68.35,92.442 72.1,92.442 72.6,93.192 72.6,95.942 71.6,96.942 71.6,97.692 70.1,97.692 70.1,95.942 68.35,95.942 68.1,95.692
GND on Top Layer (solid): 79.1,92.817 79.35,92.442 83.1,92.442 83.6,93.192 83.6,95.942 82.6,96.942 82.6,97.692 81.1,97.692 81.1,95.942 79.35,95.942 79.1,95.692
GND on Top Layer (solid): 90.1,92.817 90.35,92.442 94.1,92.442 94.6,93.192 94.6,95.942 93.6,96.942 93.6,97.692 92.1,97.692 92.1,95.942 90.35,95.942 90.1,95.692
GND on Top Layer (solid): 101.1,92.817 101.35,92.442 105.1,92.442 105.6,93.192 105.6,95.942 104.6,96.942 104.6,97.692 103.1,97.692 103.1,95.942 101.35,95.942 101.1,95.692
VCC on Top Layer (solid): 89.35,89.817 87.35,89.817 87.1,90.067 87.1,92.317 87.1,99.317 87.35,99.567 88.85,99.567 89.1,99.317 89.1,99.067 90.1,97.817 91.6,97.817 91.6,96.817 91.1,96.317 90.1,96.317 89.6,95.817 89.6,92.317 89.6,90.067
G_VCC on Top Layer (solid): 65.1,102.317 66.85,102.317 67.1,102.067 67.1,101.067 67.1,100.817 66.85,100.817 65.35,100.817 64.85,100.317 64.85,77.067 64.6,76.817 63.35,76.817 63.1,77.067 63.1,89.317 63.35,91.317 63.35,101.317 64.35,102.317
B_VCC on Top Layer (solid): 76.1,102.317 77.85,102.317 78.1,102.067 78.1,101.067 78.1,100.817 77.85,100.817 76.35,100.817 75.85,100.317 75.85,77.067 75.6,76.817 74.35,76.817 74.1,77.067 74.1,89.317 74.35,91.317 74.35,101.317 75.35,102.317
W1_VCC on Top Layer (solid): 87.1,102.317 88.85,102.317 89.1,102.067 89.1,101.067 89.1,100.817 88.85,100.817 87.35,100.817 86.85,100.317 86.85,77.067 86.6,76.817 85.35,76.817 85.1,77.067 85.1,89.317 85.35,91.317 85.35,101.317 85.85,101.817 86.35,102.317
W2_VCC on Top Layer (solid): 98.1,102.317 99.85,102.317 100.1,102.067 100.1,101.067 100.1,100.817 99.85,100.817 98.35,100.817 97.85,100.317 97.85,77.067 97.6,76.817 96.35,76.817 96.1,77.067 96.1,89.317 96.35,91.317 96.35,101.317 97.35,102.317
B_GND on Top Layer (solid): 76.851,79.567 82.35,79.567 82.6,79.817 82.6,82.317 81.85,83.067 77.35,83.067 76.6,82.317 76.6,79.817
W1_GND on Top Layer (solid): 87.85,79.567 93.35,79.567 93.6,79.817 93.6,82.317 92.85,83.067 88.35,83.067 87.6,82.317 87.6,79.817
W2_GND on Top Layer (solid): 98.85,79.567 104.349,79.567 104.599,79.817 104.6,82.317 103.85,83.067 99.35,83.067 98.6,82.317 98.6,79.817
R_VCC on Top Layer (solid): 55.85,79.067 57.6,79.067 57.85,78.817 57.85,76.817 53.35,76.817 53.35,79.567 53.85,80.067 53.85,79.817 54.6,79.067
D5_2 on Top Layer (solid): 71.35,88.067 66.1,88.067 65.6,87.817 65.6,85.317 66.35,84.567 70.85,84.567 71.6,85.317 71.6,87.817
G_GND on Top Layer (solid): 65.851,79.567 71.35,79.567 71.6,79.817 71.6,82.317 70.85,83.067 66.35,83.067 65.601,82.317 65.601,79.817
C5_1 on Top Layer (solid): 72.6,116.067 74.35,116.067 74.35,112.067 73.35,110.067 72.1,110.067 70.35,112.067 70.35,113.717 71.85,113.717 72.6,114.817
GND on Top Layer (solid): 70.35,119.317 71.85,119.317 71.85,117.817 72.6,117.567 74.6,117.567 74.6,116.567 72.6,116.567 71.85,116.317 71.85,114.117 70.35,114.117
GND on Top Layer (solid): 75.85,112.067 77.6,112.067 80.1,114.067 80.1,115.817 78.1,117.317 75.85,117.067
+5V on Top Layer (solid): 72.85,118.567 72.85,118.817 72.85,119.317 74.1,120.567 79.1,120.567 80.1,119.317 80.1,118.567 78.6,118.567 78.6,119.067 78.35,119.317 75.1,119.317 74.1,118.317
GND on Top Layer (solid): 70.35,119.067 70.35,123.067 71.85,123.067 71.85,118.817
R_VCC on Top Layer (solid): 54.1,102.317 55.85,102.317 56.1,102.067 56.1,101.067 56.1,100.817 55.85,100.817 54.35,100.817 53.85,100.317 53.85,77.067 53.6,76.817 53.35,76.817 52.1,78.067 52.1,89.317 52.35,91.317 52.35,101.317 53.35,102.317
+5V on Top Layer (solid): 78.1,120.567 78.1,121.067 78.6,121.567 79.85,121.567 80.35,121.067 80.35,118.317 79.1,118.317
VCC on Top Layer (solid): 100.35,89.817 98.35,89.817 98.1,90.067 98.1,92.317 98.1,99.317 98.35,99.567 99.85,99.567 100.1,99.317 100.1,99.067 101.1,97.817 102.6,97.817 102.6,96.817 102.1,96.317 101.1,96.317 100.6,95.817 100.6,92.317 100.6,90.067
VCC on Top Layer (solid): 78.35,89.817 76.35,89.817 76.1,90.067 76.1,92.317 76.1,99.317 76.35,99.567 77.85,99.567 78.1,99.317 78.1,99.067 79.1,97.817 80.6,97.817 80.6,96.817 80.1,96.317 79.1,96.317 78.6,95.817 78.6,92.317 78.6,90.067
VCC on Top Layer (solid): 67.35,89.817 65.35,89.817 65.1,90.067 65.1,92.317 65.1,99.317 65.35,99.567 66.85,99.567 67.1,99.317 67.1,99.067 68.1,97.817 69.6,97.817 69.6,96.817 69.1,96.317 68.1,96.317 67.6,95.817 67.6,92.317 67.6,90.067
VCC on Top Layer (solid): 56.35,89.818 54.351,89.818 54.101,90.068 54.101,92.318 54.101,99.318 54.351,99.568 55.851,99.568 56.101,99.318 56.101,99.068 57.101,97.818 58.601,97.818 58.6,96.818 58.1,96.318 57.101,96.318 56.6,95.818 56.6,92.318 56.6,90.068
GND on Top Layer (solid): 71.1,117.067 68.1,117.067 68.1,119.317 68.1,119.567 70.1,122.317 70.1,124.317 71.1,122.567
FTVS on Top Layer (solid): 63.75,117.667 63.75,119.267 66.15,119.267 66.15,117.067 65.6,117.067 62.85,114.467 61.85,115.817
GND on Top Layer (solid): 71.6,119.817 71.85,119.817 74.6,122.567 71.35,122.567 71.1,122.817

## Keep-outs
Keep-Out Layer:
  lines w0.254: 39.1,96.567 ccw(c41.1,96.567) 41.1,94.567 ; 39.102,126.506 cw(c41.102,126.506) 41.102,128.506 ; 47.1,94.567 ccw(c47.1,96.567) 49.1,96.567 ; 47.102,128.506 cw(c47.102,126.506) 49.102,126.506 ; 51.1,71.567 ccw(c55.1,71.567) 55.1,67.567 ; 51.1,125.567 cw(c55.1,125.567) 55.1,129.567 ; 104.1,67.567 ccw(c104.1,71.567) 108.1,71.567 ; 104.1,129.567 cw(c104.1,125.567) 108.1,125.567
  lines w0.254 net S$196430: 49.1,106.567 cw(c50.1,106.567) 51.1,106.567 ; 49.1,116.567 ccw(c50.1,116.567) 51.1,116.567